# Altium PCB PCB1.PcbDoc
Units mil, origin at the board's own origin, x right, y up, seen from the top; angles counter-clockwise.
Board outline 6000 x 4000 mil, 2 copper layers (Top Layer, Bottom Layer); 36 components, 48 nets, 146 pads, 0 vias.
Unrouted connection lines stored in the file: 89.
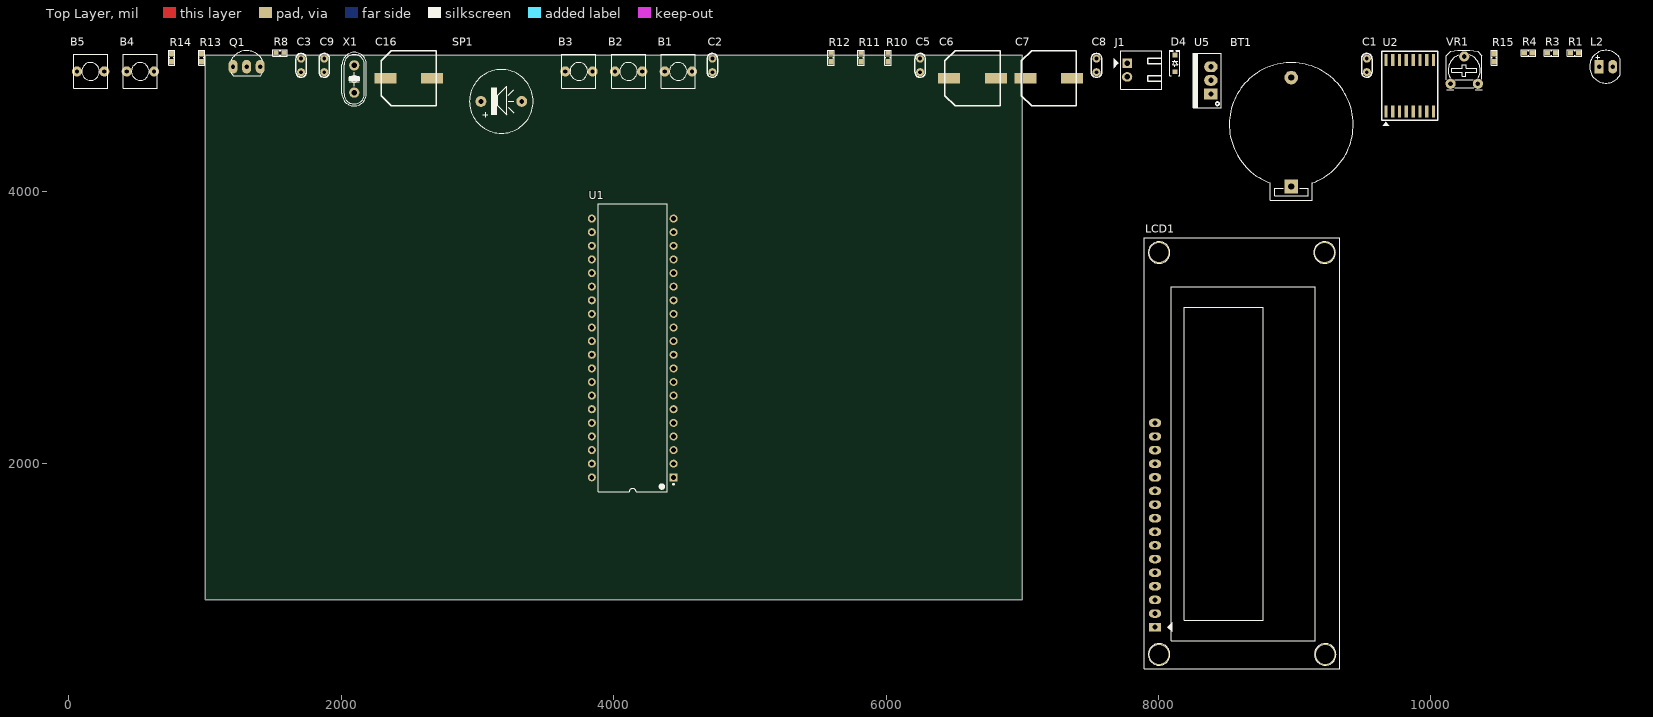
[diagram p0: Top Layer view]
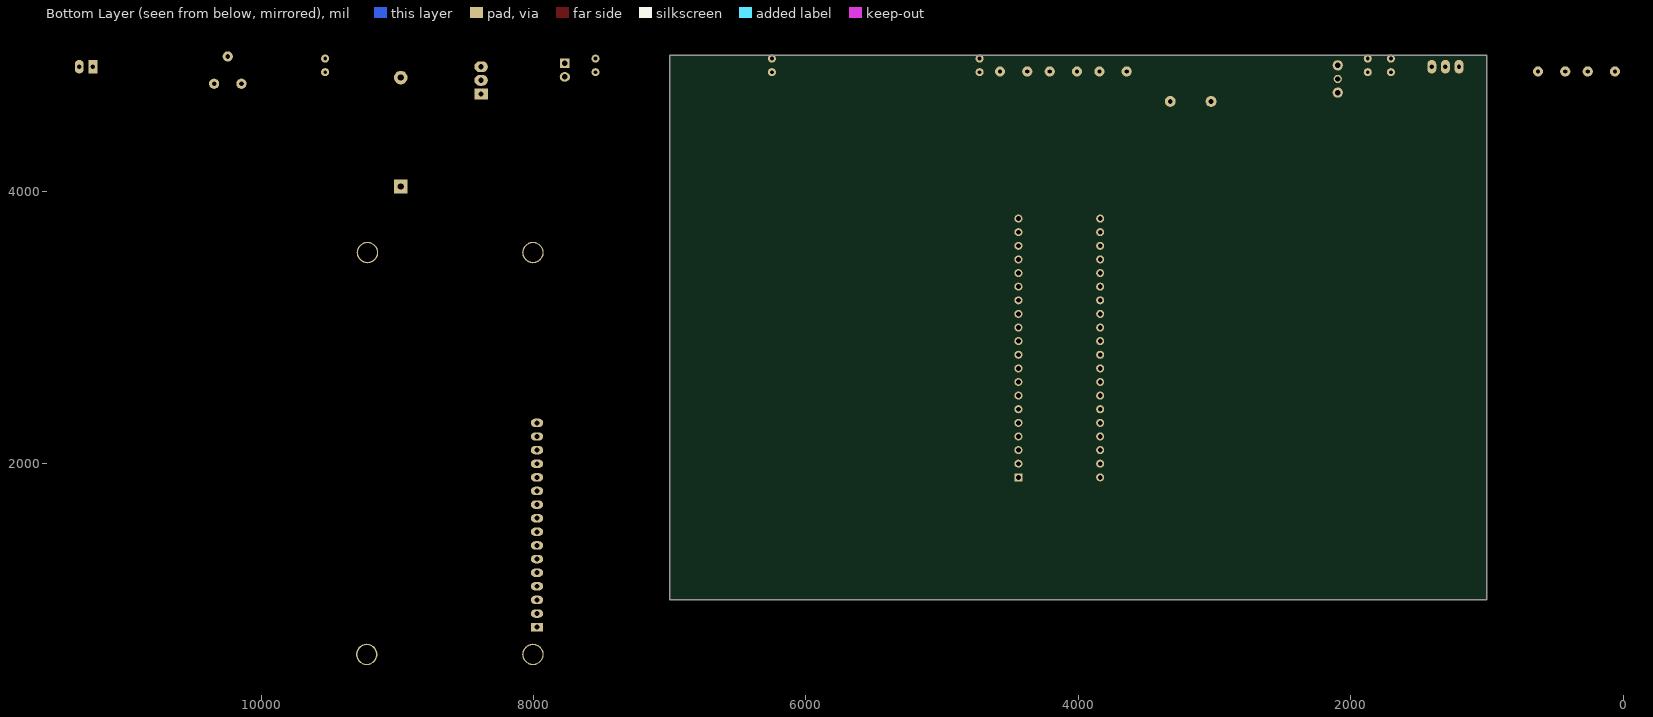
[diagram p1: Bottom Layer view, seen from below]

## Layer stack, top to bottom
Top Solder: solder mask 0.4, Solder Resist, Dk 3.5
Top Layer: signal copper 1.4
Dielectric 1: dielectric 12.6, FR-4, Dk 4.8
Bottom Layer: signal copper 1.4
Bottom Solder: solder mask 0.4, Solder Resist, Dk 3.5

## Board outline
1000,1000 7000,1000 7000,5000 1000,5000

## Design rules (kind name [scope] priority, off if disabled: settings)
Clearance [All] p1: gap=10 ignorepadtopadclearanceinfootprint=FALSE
PolygonConnect [All] p1: connectstyle=Relief reliefconductorwidth=10 reliefentries=4 polygonreliefangle="90 Angle" airgapwidth=10
RoutingVias [All] p1: holewidth=28 width=50 viastyle="Through Hole" minholewidth=28 minwidth=50 maxholewidth=28 maxwidth=50
SolderMaskExpansion [All] p1: expansion=4 istentingtop=FALSE
SupplyNets "Schematic Supply Nets_1" [InNet('+5')] p1: voltage=0.000
SupplyNets "Schematic Supply Nets" [InNet('GND')] p2: voltage=0.000
Width [All] p1: maxlimit=10 minlimit=10 preferedwidth=10
30 further rules are at their usual default settings.

## Components (designator, comment, footprint, x,y, rotation, side; value= is the part's Value field where it differs from the comment)
B1 "" SW2 4375.5,4880 r0 top value="SW chip 2 pin"
B2 "" SW2 4010.5,4880 r0 top value="SW chip 2 pin"
B3 "" SW2 3645.5,4880 r0 top value="SW chip 2 pin"
B4 "" SW2 425.5,4880 r0 top value="SW chip 2 pin"
B5 "" SW2 60.5,4880 r0 top value="SW chip 2 pin"
BT1 "PIN 3V" PIN3V 8975.5,4035 r90 top
C1 "104" "tu gom" 9530.5,4925 r90 top
C2 "22pF" "tu gom" 4725.5,4925 r90 top
C3 "22pF" "tu gom" 1705.5,4925 r90 top
C5 "100nF" "tu gom" 6250.5,4925 r90 top
C6 "100uF/25V" "tu nhom 10 (g)" 6635.5,4830 r0 top
C7 "100uF/25V" "tu nhom 10 (g)" 7195.5,4830 r0 top
C8 "100nF" "tu gom" 7545.5,4925 r90 top
C9 "100nF" "tu gom" 1875.5,4925 r90 top
C16 "100uF" "tu nhom 10 (g)" 2495.5,4830 r0 top
D4 "1N4007" "DIODE SOD-123" 8120.5,4940 r90 top
J1 "TERMINAL2" "Header 2P DC 2.54" 7770.5,4940 r0 top
L2 "LED RED" LED-5MM-RED 11235.5,4915 r0 top
LCD1 "LCD16x2A" LCD16X2 7975,800 r90 top
Q1 "NPN S8050" QTO-92 1305.5,4915 r0 top value=C1815
R1 "10k" "tro smd 0603" 11055.5,5015 r0 top
R3 "10k" "tro smd 0603" 10885.5,5015 r0 top
R4 "10k" "tro smd 0603" 10715.5,5015 r0 top
R8 "1K" "tro smd 0603" 1550.5,5015 r0 top
R10 "10k" "tro smd 0603" 6015.5,4980 r90 top
R11 "10k" "tro smd 0603" 5815.5,4980 r90 top
R12 "10k" "tro smd 0603" 5595.5,4980 r90 top
R13 "10k" "tro smd 0603" 975.5,4980 r90 top
R14 "10k" "tro smd 0603" 755.5,4980 r90 top
R15 "10k" "tro smd 0603" 10465.5,4980 r90 top
SP1 "Speaker" SPK 3025.5,4660 r0 top value="Speaker Chip"
U1 "PIC16F877A-E/P_1" PDIP600-P40 4140.01,2848.74 r90 top
U2 "DS3231" SL3016 9845.5,4775 r90 top
U5 "7805" QTO-220 8385.5,4715 r90 top value=LM7805
VR1 "10K" "Bien Tro Tam Giac Dung" 10145.5,4790 r0 top
X1 "8Mhz" XT2 2095.5,4825 r90 top

## Footprints (in the part's own frame and the unit in brackets; to place one, negate y for a bottom-side part, rotate by r counter-clockwise, add the part's x,y. Pads: shape width x height; smd on the part's side, far side on the other; paste and mask are expansions set on the pad)
"Bien Tro Tam Giac Dung" [mil] "RM065"
  round 75 hole 35: 1(0,0) 2(100,200) 3(200,0)
  silkscreen extent -31,-44 231,246, body extent -28,-50 228,228, height 279
"DIODE SOD-123" [mm] "SOD-123"
  rect 0.9x0.95 smd: 1(-1.575,0) 2(1.575,0)
  silkscreen extent -2.3,-0.92 2.41,0.92, body extent -1.86,-0.78 1.86,0.77, height 1.35
"Header 2P DC 2.54" [mil]
  rect 70x70 hole 39.37 unplated: 1(0,0)
  oval 75x70 hole 39.37 unplated: 2(0,-100)
  silkscreen extent -100,-190 255,93, body extent -50,-190 250,90, height 237
LCD16X2 [mil] "LCD dipslay 16x2, 16 pin"
  rect 62x90 hole 36: 1(0,0)
  oval 62x90 hole 36: 2(100,0) 3(200,0) 4(300,0) 5(400,0) 6(500,0) 7(600,0) 8(700,0) 9(800,0) 10(900,0) 11(1000,0) 12(1100,0) 13(1200,0) 14(1300,0) 15(1400,0) 16(1500,0)
  round 157.48 hole 137.8: "Hole 0"(-200,-30) "Hole 0"(-200,-1250) "Hole 0"(2750,-1245) "Hole 0"(2750,-30)
  silkscreen extent -305,-1355 2860,80, body extent -309,-1355 2860,82, height 414
LED-5MM-RED [mil] "LED 2 PIN, 5 ly , Only colour,pin to pin 100mil"
  rect 65x100 hole 32: 1(0,0)
  oval 65x100 hole 32: 2(100,0)
  silkscreen extent -70,-120 154,120, body extent -65,-119 149,118, height 339
PDIP600-P40 [mm] "DIP, 40-Leads, Row Spacing 15.24mm, Pitch 2.54mm, Body 51.8x13.5mm"
  rect 1.5x1.5 hole 0.9: 1(-24.098,-7.62)
  round 1.5 hole 0.9: 2(-21.558,-7.62) 3(-19.018,-7.62) 4(-16.478,-7.62) 5(-13.938,-7.62) 6(-11.398,-7.62) 7(-8.858,-7.62) 8(-6.318,-7.62) 9(-3.778,-7.62) 10(-1.238,-7.62) 11(1.302,-7.62) 12(3.842,-7.62) 13(6.382,-7.62) 14(8.922,-7.62) 15(11.462,-7.62) 16(14.002,-7.62) 17(16.542,-7.62) 18(19.082,-7.62) 19(21.622,-7.62) 20(24.162,-7.62) 21(24.162,7.62) 22(21.622,7.62) 23(19.082,7.62) 24(16.542,7.62) 25(14.002,7.62) 26(11.462,7.62) 27(8.922,7.62) 28(6.382,7.62) 29(3.842,7.62) 30(1.302,7.62) 31(-1.238,7.62) 32(-3.778,7.62) 33(-6.318,7.62) 34(-8.858,7.62) 35(-11.398,7.62) 36(-13.938,7.62) 37(-16.478,7.62) 38(-19.018,7.62) 39(-21.558,7.62) 40(-24.098,7.62)
  silkscreen extent -26.82,-7.74 26.88,6.45, body extent -26.13,-7.76 26.13,7.77, height 3.87
PIN3V [mil] "Socket PIN 3V"
  rect 100x100 hole 45: 1(0,0)
  round 100 hole 45: 2(800,0)
  silkscreen extent -100,-455 910,455, body extent -128,-447 1002,449, height 278
QTO-92 [mil] "TO-92"
  oval 66x100 hole 32: 1(-100,0) 2(0,0) 3(100,0)
  silkscreen extent -117,-65 120,118, body extent -109,-66 109,95, height 245
QTO-220 [mil] "TO-220 - 1-2-3"
  rect 80x100 hole 39: 1(0,0)
  oval 80x100 hole 39: 2(100,0) 3(200,0)
  silkscreen extent -100,-76 300,130, body extent -121,-85 321,100, height 755
SL3016 [mm]
  rect 2.2x0.6 smd: 1(-4.795,4.445) 2(-4.795,3.175) 3(-4.795,1.905) 4(-4.795,0.635) 5(-4.795,-0.635) 6(-4.795,-1.905) 7(-4.795,-3.175) 8(-4.795,-4.445) 9(4.795,-4.445) 10(4.795,-3.175) 11(4.795,-1.905) 12(4.795,-0.635) 13(4.795,0.635) 14(4.795,1.905) 15(4.795,3.175) 16(4.795,4.445)
  silkscreen extent -7.49,-5.21 6.48,5.21, body extent -5.33,-5.15 5.33,5.15, height 2.65
SPK [mil] "Speaker Chip"
  round 80 hole 35: 1(0,0) 2(300,0)
  silkscreen extent -84,-234 384,234, body extent -221,-354 511,378, height 344
SW2 [mil] "SW button 2pin, 250x 250 mil"
  round 75 hole 31: 1(0,0) 2(200,0)
  silkscreen extent -25,-125 225,125, body extent -60,-163 255,157, height 257
"tro smd 0603" [mm] "Chip Capacitor, 2-Leads, Body 1,60x0,80mm, IPC Medium Density"
  rect 1x0.95 smd mask+0.076: 1(-0.75,0) 2(0.75,0)
  silkscreen extent -1.35,-0.58 1.37,0.58, body extent -0.82,-0.42 0.82,0.43, height 0.44
"tu gom" [mm] "Tu gom mini"
  round 1.5 hole 0.7: 1(-1.27,0) 2(1.27,0)
  silkscreen extent -2.25,-0.97 2.22,0.97, body extent -2.92,-0.85 2.92,0.85, height 6.12
"tu nhom 10 (g)" [mm]
  rect 4.1x2 smd: 1(-4.35,0) 2(4.35,0)
  silkscreen extent -5.15,-5.15 5.15,5.15, body extent -5.9,-5.25 5.9,5.25, height 10.5
XT2 [mm] "Footpin for Crystal 2 pin"
  round 1.524 hole 1: 0(0,0)
  round 1.905 hole 1: 1(-2.54,0) 2(2.54,0)
  silkscreen extent -5.03,-2.29 4.96,2.29, body extent -5.93,-2.36 5.42,2.29, height 3.5

## Part data
B1 B2 B3 B4 B5: library part SW2, "Switch button 2 pin"
BT1: "Battery 3VDC"
C1: library part "Tu gom 104 50V", "Cắm", Chung_Loai=Cắm, Don_Vi=Con, Ma_Hang=MH004761, So_Chan=2, Ten_Linh_Kien="Tụ gốm 104 100nF 50V"
C2 C3 C5 C8 C9: library part "Tu gom 22pF 50V", "Cắm", Chung_Loai=Cắm, Don_Vi=Con, Ma_Hang=MH004771, So_Chan=2, Ten_Linh_Kien="Tụ gốm 22P 50V"
C6 C7 C16: library part "Tu Nhom 100uF 35V", "Dán", Chung_Loai=Dán, Don_Vi=Con, Ma_Hang=MH004019, So_Chan=2, Ten_Linh_Kien="Tụ Nhôm 100uF 35V"
D4: library part "Diode S4", "Dán", Chung_Loai=Dán, Don_Vi=Con, Ma_Hang=MH005519, Ten_Linh_Kien="Diode S4 SOD123 ( 1N5819 SOD123)"
J1: library part "Header 2P 2.54 Duc Cong", "Cắm", Chung_Loai=Cắm, Don_Vi=Con, Ma_Hang=MH002852, Ten_Linh_Kien="Header 2P XH2.54-2P Đực Cong"
L2: library part "LED 5mm Do", "Cắm", Chung_Loai=Cắm, Don_Vi=Con, Ma_Hang=MH008967, Ten_Linh_Kien="Led 5MM Phủ Đỏ (1000c)"
LCD1: library part LCD16x2, "LCD dipslay 16 char, 2 line"
Q1: library part NPN_ECB, "P 600mW, ECB"
R1 R3 R4 R8 R10 R11 R12 R13 R14 R15: library part "Tro 0603 5% 10k", "Dán", Chung_Loai=Dán, Don_Vi=Con, Ma_Hang=MH006316, So_Chan=2, Ten_Linh_Kien="Trở 0603 5% 10k"
SP1: library part SPK, "Speaker Chip"
U1: "Enhanced FLASH Microcontroller, 8K (x14-Bit words) FLASH, 368 Bytes RAM, 40-Pin PDIP, Standard VDD Range, Extended Temperature", Supplier Part Number 1=PIC16F877A-E/P-ND, ComponentAvailability="Unknown. Contact manufacturer to determine status.", ComponentLink1Description=Datasheet, ComponentLink1URL=http://ww1.microchip.com/downloads/en/DeviceDoc/39582b.pdf, ComponentLink2Description="Packaging Specification", ComponentLink2URL=http://www.microchip.com/stellent/groups/techpub_sg/documents/packagingspec/en012702.pdf, ComponentLink3Description="Microchip.com Home", ComponentLink3URL=http://www.microchip.com/, DatasheetVersion="revB, Oct-2003", LatestRevisionDate=29-Jan-2009, LatestRevisionNote="Sch. layout revised. 3D Model Removed.", PackageDescription="40-Lead Plastic Dual In-Line (P) - 600 mil Body [PDIP]", PackageReference=PDIP600-P40, PackageVersion="revBB, Aug-2009", Published=11-Oct-2004, Publisher="Altium Limited", Supplier 1=Digi-Key, Supplier 2=Farnell, Supplier Part Number 2=1567990
U5: library part LM78xx, "On ap +, from + 5 to + 24VDC"
VR1: library part "Bien tro tam giac 10K Dung", "Cắm", Chung_Loai=Cắm, Don_Vi=Con, Ma_Hang=MH000919, Ten_Linh_Kien="Biến Trở Tam Giác 103-10K RM065 (Chân Đứng)"
X1: library part XT2, "Crystal For all Crystal 2pin."

## Nets (pads, with @x,y where several pads share a name; then routed paths per layer and width w, separated by ;. In a path a pad name is that pad's centre, name@x,y a point inside that pad or via, vN(x,y) a via of type N, cw(c..) or ccw(c..) an arc to the next point about the centre after c; other vN are vias at no path point)
32kHz: U2.1
+5: C1.1 C7.1 C8.1 C9.1 C16.2 LCD1.2 R1.2 R3.2 R10.1 R11.1 R12.1 R13.1 R14.1 R15.1 SP1.1 U1.1 U1.11 U1.32 U2.2 U5.3 VR1.1
BT1: B1.2 R10.2 U1.33
BT2: B2.2 R11.2 U1.34
BT3: B3.2 R12.2 U1.35
BT4: B4.2 R13.2 U1.36
BT5: B5.2 R14.2 U1.37
BZ: R8.1 U1.30
D4: LCD1.11 U1.22
D5: LCD1.12 U1.27
D6: LCD1.13 U1.28
D7: LCD1.14 U1.29
EN: LCD1.6 U1.21
GND: B1.1 B2.1 B3.1 B4.1 B5.1 BT1.1 C1.2 C2.2 C3.2 C5.2 C6.2 C7.2 C8.2 C9.2 J1.1 L2.2 LCD1.1 LCD1.16 Q1.1 U1.12 U1.31 U2.5 U2.6 U2.7 U2.8 U2.9 U2.10 U2.11 U2.12 U2.13 U5.2 VR1.3
INT/SQW: U2.3
"LED ALARM": R4.1 U1.38
NetBT1_2: BT1.2 U2.14
NetC2_1: C2.1 U1.13 X1.1
NetC3_1: C3.1 U1.14 X1.2
NetC5_1: C5.1 C6.1 D4.2 U5.1
NetC16_1: C16.1 Q1.2 SP1.2
NetD4_1: D4.1 J1.2
NetL2_1: L2.1 R4.2
NetLCD1_3: LCD1.3 VR1.2
NetLCD1_15: LCD1.15 R15.2
NetQ1_3: Q1.3 R8.2
RA0: U1.2
RA1: U1.3
RA2: U1.4
RA3: U1.5
RA4: U1.6
RA5: U1.7
RB6: U1.39
RB7: U1.40
RC0: U1.15
RC1: U1.16
RC2: U1.17
RC5: U1.24
RC6: U1.25
RC7: U1.26
RE0: U1.8
RE1: U1.9
RE2: U1.10
RS: LCD1.4 U1.19
RST: U2.4
RW: LCD1.5 U1.20
SCL: R3.1 U1.18 U2.16
SDA: R1.1 U1.23 U2.15
pads on no net: "LCD1.Hole 0" LCD1.7 LCD1.8 LCD1.9 LCD1.10 X1.0